# Altium PCB AT32_FOC.pcbdoc (part 2 of 2)
Units mil, origin at the board's own origin, x right, y up, seen from the top; angles counter-clockwise.
Board outline 11370.16 x 13019.92 mil, 2 copper layers (Top Layer, Bottom Layer); 154 components, 92 nets, 477 pads, 506 vias.
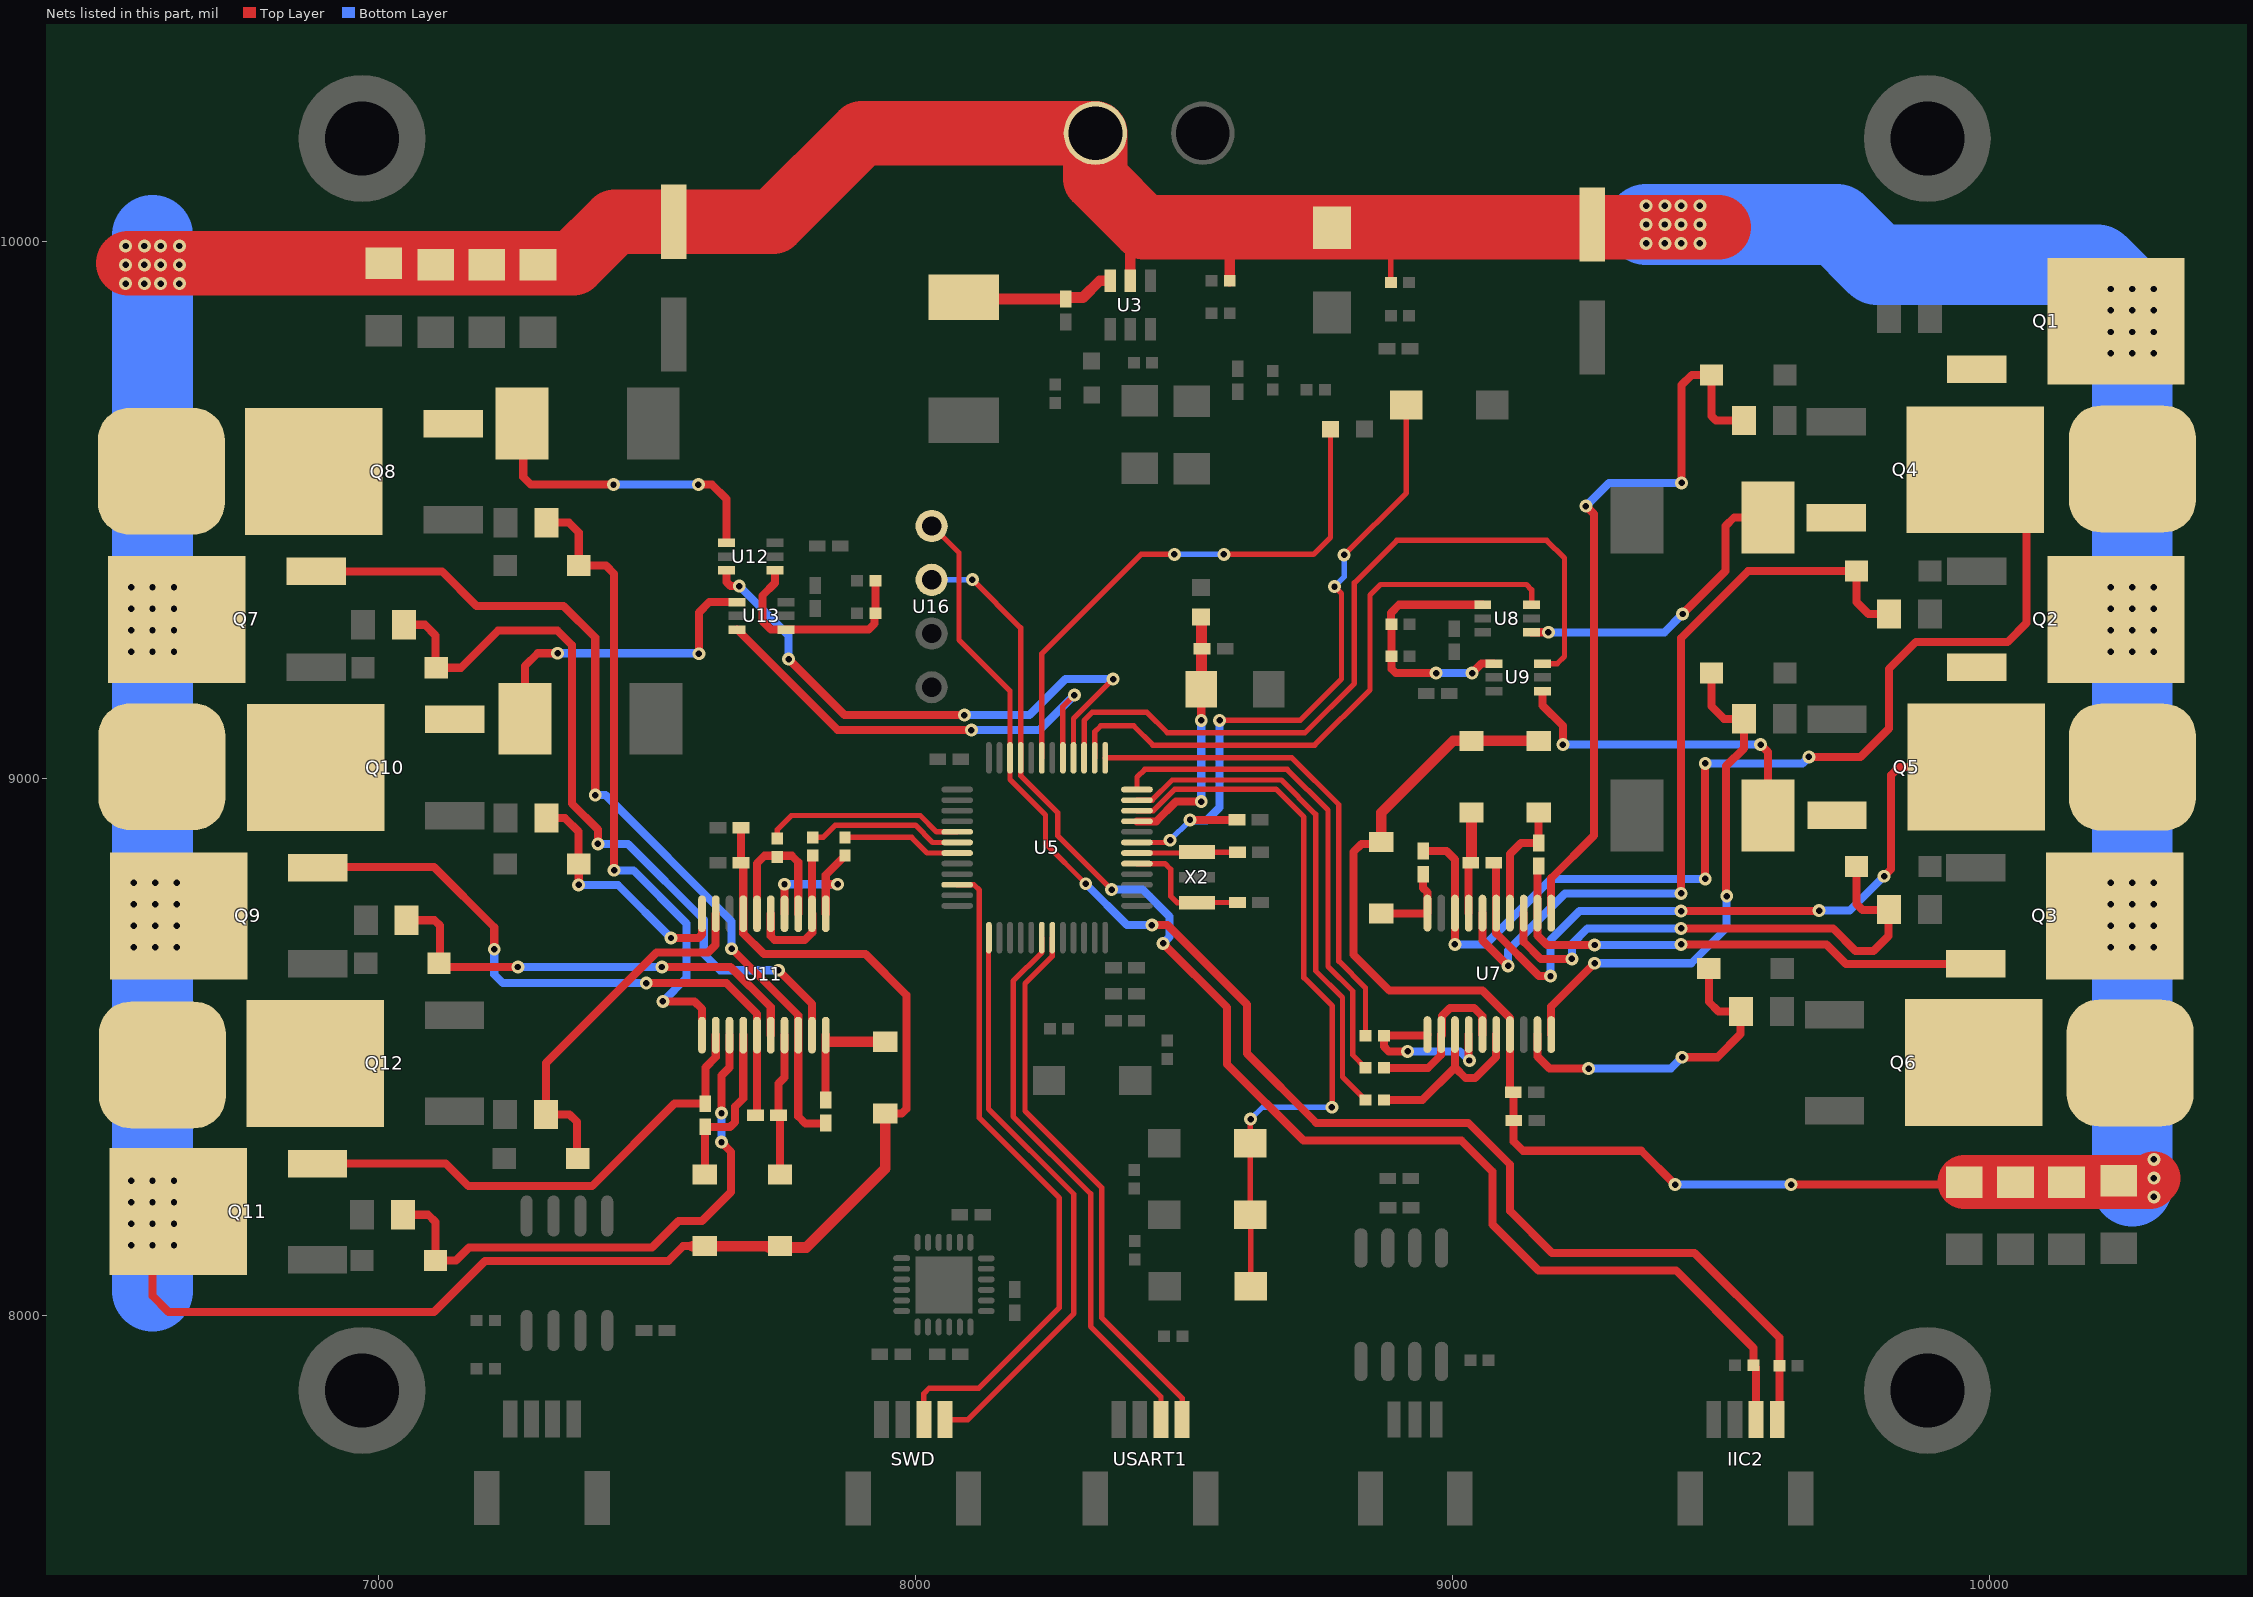
[diagram p2: the nets of this part, all layers, seen from the top]

## Via types
v1: diameter 24.02, hole 12.01, Top Layer to Bottom Layer, 506 vias

## Nets (pads, with @x,y where several pads share a name; then routed paths per layer and width w, separated by ;. In a path a pad name is that pad's centre, name@x,y a point inside that pad or via, vN(x,y) a via of type N, cw(c..) or ccw(c..) an arc to the next point about the centre after c; other vN are vias at no path point) (continued)
M0_HO1_1: D14.1 R32.1 U11.19 | length 1427.8
  Top Layer w15: R32.1@7048.12,9285.92 7087.08,9285.92 7107.08,9265.92 7107.08,9207.23 D14.1@7108.38,9205.92 7154.08,9205.92 7223.08,9274.92 7334.08,9274.92 7361.08,9247.92 7361.08,8952.92 7409.08,8904.92 v1(7409.08,8877.92) ; v1(7745.08,8642.92) 7807.57,8580.43 U11.19@7807.57,8522.01
  Bottom Layer w15: v1(7409.08,8877.92) 7465.08,8877.92 7606.08,8736.92 7606.08,8672.92 7636.08,8642.92 v1(7745.08,8642.92)
M0_HO2: D5.1 R16.1 U7.16 | length 1493.6
  Top Layer w15: U7.16@9055.44,8749.22 9055.44,8698.56 v1(9103.08,8650.92) ; v1(9425.08,8785.92) 9425.08,9260.92 9550.08,9385.92 D5.1@9751.77,9385.92 9751.77,9328.23 9774.08,9305.92 R16.1@9812.04,9305.92
  Bottom Layer w15: v1(9103.08,8650.92) 9103.08,8679.92 9209.08,8785.92 v1(9425.08,8785.92)
M0_HO2_1: D16.1 R34.1 U11.16 | length 840.3
  Top Layer w15: R34.1@7053.12,8735.92 7105.08,8735.92 7115.08,8725.92 7115.08,8657.62 D16.1@7113.38,8655.92 7120.38,8648.92 v1(7260.08,8648.92) ; v1(7528.08,8648.92) 7656.08,8648.92 7730.79,8574.21 U11.16@7730.79,8522.01
  Bottom Layer w15: v1(7260.08,8648.92) v1(7528.08,8648.92)
M0_HO3: D6.1 R17.1 U7.13 | length 997.5
  Top Layer w15: U7.13@9132.21,8749.22 9132.21,8695.79 9164.08,8663.92 v1(9222.08,8663.92) ; v1(9425.08,8720.92) 9708.08,8720.92 9750.08,8678.92 9783.08,8678.92 9811.04,8706.88 R17.1@9811.04,8754.92 ; D6.1@9751.77,8835.92 9751.77,8766.23 9763.08,8754.92 R17.1@9811.04,8754.92 ; R17.1@9812.04,8755.92 R17.1@9811.04,8754.92
  Bottom Layer w15: v1(9222.08,8663.92) 9222.08,8691.92 9251.08,8720.92 v1(9425.08,8720.92)
M0_HO3_1: D18.1 R36.1 U11.13 | length 1046.4
  Top Layer w15: R36.1@7046.31,8187.78 7093.22,8187.78 7106.57,8174.43 D18.1@7106.57,8102.78 7144.94,8102.78 7169.08,8126.92 7509.86,8126.92 7558.86,8175.92 7603.08,8175.92 7657.08,8229.92 7657.08,8304.92 v1(7639.08,8322.92) ; v1(7639.08,8376.92) 7639.08,8446.92 7654.02,8461.87 U11.13@7654.02,8522.01
  Bottom Layer w15: v1(7639.08,8322.92) v1(7639.08,8376.92)
M0_IN1: R12.2 U7.1 U7.4 | length 320.9
  Top Layer w15: v1(8916.08,8491.92) 8881.08,8491.92 8871.93,8501.07 R12.2@8871.93,8521.31 8951.22,8521.31 U7.1@8953.07,8523.16 ; U7.4@9029.84,8523.16 9029.84,8476.16 v1(9031.08,8474.92)
  Bottom Layer w15: v1(8916.08,8491.92) 9014.08,8491.92 v1(9031.08,8474.92)
M0_IN1_1: R42.2 U11.1 U11.4 | length 298.6
  Top Layer w15: U11.4@7756.39,8748.07 v1(7756.39,8802.92) ; U11.1@7833.16,8748.07 7833.16,8803.78 ; v1(7855.08,8802.92) 7834.02,8802.92 7833.16,8803.78 ; R42.2@7868.93,8856.05 7833.16,8820.28 7833.16,8803.78
  Bottom Layer w15: v1(7756.39,8802.92) v1(7855.08,8802.92)
M0_IN2: R13.2 U7.2 U7.5 | length 314.7
  Top Layer w15: R13.2@8871.93,8461.31 8954.46,8461.31 8978.66,8485.5 U7.2@8978.66,8523.16 8979.89,8521.92 8979.89,8557.92 8994.89,8572.92 9040.08,8572.92 9055.08,8557.92 9055.08,8523.51 U7.5@9055.44,8523.16
M0_IN2_1: R43.2 U11.2 U11.5 | length 271.8
  Top Layer w15: U11.5@7730.79,8748.07 7730.79,8706.28 7738.15,8698.92 7794.08,8698.92 7808.08,8712.92 7808.08,8747.57 U11.2@7807.57,8748.07 7807.57,8854.69 R43.2@7808.93,8856.05
M0_IN3: R14.2 U7.3 U7.6 | length 361.8
  Top Layer w15: R14.2@8871.93,8401.31 8943.46,8401.31 9004.25,8462.09 ; U7.3@9004.25,8523.16 9004.25,8462.09 ; U7.6@9081.03,8523.16 9081.03,8481.36 9041.58,8441.92 9024.42,8441.92 9004.25,8462.09
M0_IN3_1: R44.2 U11.3 U11.6 | length 277.6
  Top Layer w15: U11.6@7705.2,8748.07 7705.08,8748.2 7705.08,8841.92 7719.2,8856.05 7769.95,8856.05 7781.98,8844.02 U11.3@7781.98,8748.07
M0_IN_IU: Q4.3 R21.2 U8.4 | length 578.3
  Top Layer w15: U8.4@9146.58,9271.98 v1@9178.02,9271.98 ; v1(9428.08,9305.92) 9508.08,9385.92 9508.08,9469.92 9524.08,9485.92 R21.2@9587.12,9485.92
  Bottom Layer w15: v1(9178.08,9271.92) 9394.08,9271.92 v1(9428.08,9305.92)
M0_IN_IU_1: Q8.3 R40.2 U12.4 | length 577.6
  Top Layer w15: R40.2@7268.03,9660.92 7270.08,9658.88 7270.08,9560.92 7284.08,9546.92 v1(7438.08,9546.92) ; v1(7596.08,9546.92) 7621.08,9546.92 7648.3,9519.7 U12.4@7648.3,9438.19
  Bottom Layer w15: v1(7438.08,9546.92) v1(7596.08,9546.92)
M0_IN_IV: Q5.3 R22.2 U9.4 | length 621.1
  Top Layer w15: U9.4@9167.35,9162.33 9167.08,9162.06 9167.08,9135.92 9205.08,9097.92 v1(9205.08,9062.92) ; v1(9573.08,9062.92) 9587.12,9048.88 R22.2@9587.12,8930.92
  Bottom Layer w15: v1(9205.08,9062.92) v1(9573.08,9062.92)
M0_IN_IV_1: Q10.3 R41.2 U13.4 | length 588.6
  Top Layer w15: R41.2@7273.03,9110.92 7273.03,9208.88 7297.08,9232.92 v1(7334.08,9232.92) ; v1(7597.08,9231.92) 7597.08,9308.92 7616.35,9328.19 U13.4@7668.3,9328.19
  Bottom Layer w15: v1(7334.08,9232.92) 7596.08,9232.92 v1(7597.08,9231.92)
M0_IU: U5.14 U8.6 | length 1140.4
  Top Layer w10: U5.14@8333.66,9038.24 8333.66,9086.5 8345.08,9097.92 8406.08,9097.92 8442.08,9061.92 8743.08,9061.92 8846.08,9164.92 8846.08,9340.92 8866.08,9360.92 9137.08,9360.92 9147.08,9350.92 9147.08,9323.66 U8.6@9146.58,9323.16
M0_IU_1: U5.16 U12.6 | length 1074.4
  Top Layer w10: U5.16@8294.29,9038.24 8294.29,9111.13 v1(8368.08,9184.92)
  Top Layer w15: U12.6@7648.3,9387.01 7648.3,9365.8 7656.17,9357.92 v1(7672.08,9357.92) ; v1(7764.08,9221.92) 7868.08,9117.92 v1(8091.08,9117.92)
  Bottom Layer w15: v1(7672.08,9357.92) 7764.08,9265.92 v1(7764.08,9221.92) ; v1(8091.08,9117.92) 8212.08,9117.92 8279.08,9184.92 v1(8368.08,9184.92)
M0_IV: U5.15 U9.6 | length 1486.5
  Top Layer w10: U5.15@8313.98,9038.24 8313.98,9107.82 8329.08,9122.92 8431.08,9122.92 8469.09,9084.91 8725.07,9084.91 8817.08,9176.92 8817.08,9363.92 8896.08,9442.92 9175.08,9442.92 9208.08,9409.92 9208.08,9226.92 9194.67,9213.51 U9.6@9167.35,9213.51
M0_IV_1: U5.17 U13.6 | length 857.8
  Top Layer w10: U5.17@8274.61,9038.24 8274.61,9133.45 v1(8296.08,9154.92)
  Top Layer w15: U13.6@7668.3,9277.01 7855.39,9089.92 v1(8104.08,9089.92)
  Bottom Layer w15: v1(8104.08,9089.92) 8231.08,9089.92 v1(8296.08,9154.92)
M0_LO1: D7.1 R18.1 U7.11 | length 1378.7
  Top Layer w15: U7.11@9183.39,8749.22 9183.39,8814.23 9263.08,8893.92 9263.08,9491.92 v1(9248.08,9506.92) ; v1(9426.08,9549.92) 9426.08,9731.92 9445.08,9750.92 D7.1@9481.77,9750.92 9481.77,9674.23 9490.08,9665.92 R18.1@9542.04,9665.92
  Bottom Layer w15: v1(9248.08,9506.92) 9291.08,9549.92 v1(9426.08,9549.92)
M0_LO1_1: D15.1 R33.1 U11.11 | length 1220.3
  Top Layer w15: R33.1@7313.12,9475.92 7355.08,9475.92 7373.38,9457.62 D15.1@7373.38,9395.92 7424.08,9395.92 7439.08,9380.92 v1(7439.08,8828.92) ; v1(7530.08,8584.92) 7589.08,8584.92 7602.84,8571.16 U11.11@7602.84,8522.01
  Bottom Layer w15: v1(7439.08,8828.92) 7475.08,8828.92 7574.08,8729.92 7574.08,8628.92 v1(7530.08,8584.92)
M0_LO2: D8.1 R19.1 U7.10 | length 974.2
  Top Layer w15: U7.10@9183.39,8523.16 9183.39,8575.23 v1(9264.08,8655.92) ; D8.1@9481.77,9195.92 9481.77,9134.23 9505.08,9110.92 R19.1@9542.04,9110.92 ; v1(9510.08,8780.92) 9509.08,8781.92 9509.08,9022.85 9542.08,9055.85 R19.1@9542.08,9110.88
  Bottom Layer w15: v1(9264.08,8655.92) 9444.08,8655.92 9510.08,8721.92 v1(9510.08,8780.92)
M0_LO2_1: D17.1 R35.1 U11.10 | length 481.5
  Top Layer w15: R35.1@7313.12,8925.92 7348.08,8925.92 7373.08,8900.92 7373.08,8841.23 D17.1@7373.38,8840.92 7373.38,8802.23 v1(7373.08,8801.92) ; v1(7545.08,8702.92) 7596.08,8702.92 7602.84,8709.69 U11.10@7602.84,8748.07
  Bottom Layer w15: v1(7373.08,8801.92) 7446.08,8801.92 v1(7545.08,8702.92)
M0_LO3: D9.1 R20.1 U7.9 | length 626.9
  Top Layer w15: U7.9@9157.8,8523.16 9157.8,8482.2 9180.08,8459.92 v1(9253.08,8459.92) ; v1(9427.08,8480.92) 9493.08,8480.92 9536.08,8523.92 9536.08,8564.96 R20.1@9537.04,8565.92 9495.08,8565.92 9476.77,8584.23 D9.1@9476.77,8645.92
  Bottom Layer w15: v1(9253.08,8459.92) 9406.08,8459.92 v1(9427.08,8480.92)
M0_LO3_1: D19.1 R37.1 U11.9 | length 692.5
  Top Layer w15: D19.1@7371.57,8292.78 7370.08,8294.27 7370.08,8360.92 7356.46,8374.54 R37.1@7312.46,8374.54 7312.46,8470.31 7518.08,8675.92 7613.84,8675.92 7628.08,8690.16 7628.08,8747.72 U11.9@7628.43,8748.07
M0_UOUT: C18.1 Q1.3 Q4.2 U2.1 U7.18 | length 2055.1
  Top Layer w15: C18.1@8945.08,8864.68 8988.32,8864.68 9004.25,8848.75 U7.18@9004.25,8749.22 9004.08,8749.05 v1(9004.08,8690.92) ; v1(9470.08,8812.92) v1(9470.08,9027.92) ; v1@9660.08,9041.92 9661.08,9041.92 v1(9663.08,9039.92) 9759.08,9039.92 9812.08,9092.92 9812.08,9203.92 9862.08,9253.92 10033.08,9253.92 10068.08,9288.92 10068.08,9479.41 Q4.2@9973.02,9574.47
  Bottom Layer w15: v1(9004.08,8690.92) 9061.08,8690.92 9183.08,8812.92 v1(9470.08,8812.92) ; v1(9470.08,9027.92) 9651.08,9027.92 v1(9663.08,9039.92)
M0_UOUT_1: C31.1 Q7.3 Q8.2 U1.1 U11.18 | length 1685.9
  Top Layer w15: Q7.3@6884.68,9385.4 7118.6,9385.4 7183.08,9320.92 7345.08,9320.92 7404.08,9261.92 v1(7404.08,8968.92) ; v1(7658.08,8682.92) 7781.98,8559.02 U11.18@7781.98,8522.01 7781.98,8371.02 7795.08,8357.92 7832.54,8357.92 C31.1@7833.08,8358.46
  Bottom Layer w15: v1(7404.08,8968.92) 7423.08,8968.92 7658.08,8733.92 v1(7658.08,8682.92)
M0_VB1: C18.2 D1.1 U7.20 | length 162.1
  Top Layer w15: D1.1@8867.18,8748.29 8952.14,8748.29 U7.20@8953.07,8749.22 8953.07,8787.93 8945.08,8795.92 C18.2@8945.08,8821.76
M0_VB1_1: C31.2 D11.1 U11.20 | length 223.5
  Top Layer w15: C31.2@7833.08,8401.38 7833.08,8521.93 U11.20@7833.16,8522.01
  Top Layer w20: 7841.08,8509.72 D11.1@7943.93,8509.72
M0_VB2: C19.2 D2.1 U7.17 | length 189.5
  Top Layer w15: U7.17@9029.84,8749.22 9029.84,8839.44 C19.2@9033.62,8843.22
  Top Layer w20: C19.2@9033.62,8843.22 9035.08,8844.68 D2.1@9035.08,8936.59
M0_VB2_1: C32.2 D12.1 U11.17 | length 265.1
  Top Layer w15: D12.1@7748.08,8262.55 7748.08,8370.4 C32.2@7745.39,8373.09 7745.39,8432.23 7756.39,8443.24 U11.17@7756.39,8522.01
M0_VB3: C20.2 D3.1 U7.14 | length 229.2
  Top Layer w15: U7.14@9106.62,8749.22 9106.62,8859.46 9127.08,8879.92 9159.84,8879.92 C20.2@9160.08,8879.68 D3.1@9160.08,8936.59
M0_VB3_1: C30.2 D13.1 U11.14 | length 317.1
  Top Layer w15: D13.1@7608.08,8262.55 7608.08,8350.77 C30.2@7608.93,8351.63 7609.63,8350.92 7655.08,8350.92 7664.61,8360.46 7664.61,8389.46 7679.61,8404.46 U11.14@7679.61,8522.01
M0_VOUT: C19.1 Q2.3 Q5.2 U7.15 V2.1 | length 1362.9
  Top Layer w15: C19.1@9076.54,8843.22 9081.03,8838.73 U7.15@9081.03,8749.22 9081.03,8711.76 9160.86,8631.92 v1(9182.08,8631.92) ; v1(9425.08,8752.92) 9681.08,8752.92 v1(9682.08,8753.92) ; v1(9803.08,8817.92) 9816.08,8830.92 9816.08,9005.92 9831.08,9020.92 Q5.2@9974.68,9020.92
  Bottom Layer w15: v1(9182.08,8631.92) 9182.08,8698.92 9236.08,8752.92 v1(9425.08,8752.92) ; v1(9682.08,8753.92) 9739.08,8753.92 v1(9803.08,8817.92)
M0_VOUT_1: C32.1 Q9.3 Q10.2 U11.15 V1.1 | length 1172.5
  Top Layer w15: Q9.3@6887.71,8833.7 6888.93,8834.92 7104.08,8834.92 7216.08,8722.92 v1(7216.08,8681.92) ; v1(7499.08,8618.92) 7648.08,8618.92 7705.2,8561.8 U11.15@7705.2,8522.01 7705.2,8375.82 C32.1@7702.47,8373.09
  Bottom Layer w15: v1(7216.08,8681.92) 7216.08,8634.92 7232.08,8618.92 v1(7499.08,8618.92)
M0_VS3: C20.1 Q3.3 Q6.2 U7.12 W2.1 | length 968.6
  Top Layer w15: C20.1@9160.08,8836.76 9157.8,8834.48 U7.12@9157.8,8749.22 9157.8,8707.42 9175.3,8689.92 v1(9264.08,8689.92) ; v1(9425.08,8690.92) 9696.08,8690.92 9732.32,8654.68 Q3.3@9973.47,8654.68
  Bottom Layer w15: v1(9264.08,8689.92) 9424.08,8689.92 v1(9425.08,8690.92)
M0_VS3_1: C30.1 Q11.3 Q12.2 U11.12 W1.1 | length 938.3
  Top Layer w15: Q11.3@6887.28,8283.12 7125.88,8283.12 7168.08,8240.92 7398.08,8240.92 7551.7,8394.55 C30.1@7608.93,8394.55 7609.08,8394.69 7609.08,8461.92 7628.43,8481.28 U11.12@7628.43,8522.01
NRST: C11.2 NRST.1 U5.7 | length 1258.8
  Top Layer w10: U5.7@8412.4,8880.76 8469.92,8880.76 v1(8474.08,8884.92) ; v1(8566.08,9107.92) 8716.08,9107.92 8793.08,9184.92 8793.08,9343.92 v1(8780.08,9356.92) ; v1(8798.08,9415.92) 8913.73,9531.58 NRST.1@8913.73,9694.92
  Top Layer w15: v1(8511.08,8922.88) C11.2@8598.62,8922.88
  Bottom Layer w10: v1(8474.08,8884.92) v1@8510.08,8920.92 ; v1(8780.08,9356.92) 8798.08,9374.92 v1(8798.08,9415.92)
  Bottom Layer w15: v1(8511.08,8922.88) 8512.04,8921.92 8542.08,8921.92 8566.08,8945.92 v1(8566.08,9107.92)
OSC_IN: C14.2 U5.5 X2.1 | length 246.7
  Top Layer w10: U5.5@8412.4,8841.39 8464.61,8841.39 8475.08,8830.92 8475.08,8780.92 8487.32,8768.68 X2.1@8524.53,8768.68 8524.77,8768.92 C14.2@8599.62,8768.92
OSC_OUT: C12.1 U5.6 X2.3 | length 188.2
  Top Layer w10: U5.6@8412.4,8861.08 8522.45,8861.08 X2.3@8524.53,8863.16 8524.87,8862.83 C12.1@8599.62,8862.83
PA0: KEY1.1 KEY2.1 KEY3.1 U5.10 | length 1381.8
  Top Layer w10: U5.10@8412.4,8939.82 8442.98,8939.82 8483.08,8979.92 8671.08,8979.92 8723.08,8927.92 8723.08,8629.14 8776.08,8576.14 8776.08,8388.92 v1(8775.08,8387.92) ; v1@8623.08,8364.92 8623.2,8364.8 KEY1.1@8623.2,8320.92 KEY2.1@8623.2,8187.92 8624.2,8186.92 KEY3.1@8624.2,8054.92
  Bottom Layer w10: v1(8624.08,8365.92) 8646.08,8387.92 v1(8775.08,8387.92)
PA1: R14.1 U5.11 | length 944.7
  Top Layer w10: U5.11@8412.4,8959.5 8440.66,8959.5 8478.08,8996.92 8681.08,8996.92 8745.08,8932.92 8745.08,8641.92 8795.08,8591.92 8795.08,8444.08 R14.1@8837.85,8401.31
PA2: R13.1 U5.12 | length 924.8
  Top Layer w10: U5.12@8412.4,8979.19 8412.4,9002.24 8427.08,9016.92 8692.08,9016.92 8768.08,8940.92 8768.08,8649.92 8814.08,8603.92 8814.08,8485.08 R13.1@8837.85,8461.31
PA3: R12.1 U5.13 | length 921.1
  Top Layer w10: U5.13@8353.35,9038.24 8700.76,9038.24 8788.08,8950.92 8788.08,8659.92 8837.85,8610.15 R12.1@8837.85,8521.31
PA8: R44.1 U5.29 | length 375
  Top Layer w10: R44.1@7743.08,8887.96 7743.08,8904.92 7769.08,8930.92 8009.08,8930.92 8039.55,8900.45 U5.29@8077.76,8900.45
PA9: R43.1 U5.30 | length 291.6
  Top Layer w10: R43.1@7808.93,8890.13 7828.28,8890.13 7851.08,8912.92 8000.08,8912.92 8032.24,8880.76 U5.30@8077.76,8880.76
PA10: R42.1 U5.31 | length 220.9
  Top Layer w10: R42.1@7868.93,8890.13 7992.87,8890.13 8021.92,8861.08 U5.31@8077.76,8861.08
PA13: SWD.3 U5.34 | length 1251.3
  Top Layer w10: SWD.3@8015.76,7806.55 8015.76,7855.08 8025.76,7865.08 8118.24,7865.08 8268.08,8014.92 8268.08,8218.92 8119.08,8367.92 8119.08,8791.92 8108.98,8802.02 U5.34@8077.76,8802.02
PA14: SWD.4 U5.37 | length 1087.5
  Top Layer w10: SWD.4@8055.13,7806.55 8097.57,7806.55 8295.08,8004.06 8295.08,8225.92 8136.08,8384.92 8136.08,8702.87 U5.37@8136.81,8703.6
PB1: LED2.1 U5.19 | length 1022.2
  Top Layer w10: U5.19@8235.24,9038.24 8235.24,9232.08 8420.08,9416.92 v1(8482.08,9416.92) ; v1(8574.08,9416.92) 8741.08,9416.92 8772.73,9448.57 LED2.1@8772.73,9649.78
  Bottom Layer w10: v1(8482.08,9416.92) v1(8574.08,9416.92)
PB6: U5.42 USART1.3 | length 1033
  Top Layer w10: U5.42@8235.24,8703.6 8235.24,8676.01 8182.08,8622.85 8182.08,8370.92 8326.08,8226.92 8326.08,7979.92 8457.08,7848.92 USART1.3@8457.08,7806.55
PB7: U5.43 USART1.4 | length 1039.2
  Top Layer w10: U5.43@8254.92,8703.6 8254.92,8669.1 8204.08,8618.26 8204.08,8380.92 8347.08,8237.92 8347.08,7995.92 8496.45,7846.55 USART1.4@8496.45,7806.55
PB10: IIC2.3 R47.1 U5.21 U16.3 | length 2609.6
  Top Layer w10: v1(8106.08,9369.92) 8195.87,9280.13 U5.21@8195.87,9038.24 8195.87,9005.13 8265.08,8935.92 8265.08,8892.92 v1(8365.08,8792.92)
  Top Layer w15: v1(8461.08,8692.92) 8580.08,8573.92 8580.08,8467.92 8722.08,8325.92 9016.08,8325.92 9074.08,8267.92 9074.08,8169.92 9160.08,8083.92 9416.08,8083.92 9559.96,7940.04 R47.1@9559.96,7907.92 9564.76,7903.12 IIC2.3@9564.76,7806.55
  Bottom Layer w10: U16.3@8030.28,9369.62 8030.58,9369.92 v1(8106.08,9369.92)
  Bottom Layer w15: v1(8365.08,8792.92) 8423.08,8792.92 8473.08,8742.92 8473.08,8704.92 v1(8461.08,8692.92)
PB11: IIC2.4 R48.1 U5.22 U16.4 | length 2683.8
  Top Layer w10: U16.4@8030.28,9469.62 8031.38,9469.62 8081.08,9419.92 8081.08,9257.92 8176.18,9162.82 U5.22@8176.18,9038.24 8176.18,8997.82 8242.08,8931.92 8242.08,8878.92 v1(8317.08,8803.92)
  Top Layer w15: v1(8440.08,8726.92) 8469.08,8726.92 8617.08,8578.92 8617.08,8487.92 8746.08,8358.92 9029.08,8358.92 9107.08,8280.92 9107.08,8194.92 9185.08,8116.92 9450.08,8116.92 9608.08,7958.92 R48.1@9608.08,7907.19 ; IIC2.4@9604.13,7806.55 9608.14,7810.56 R48.1@9608.14,7907.13
  Bottom Layer w15: v1(8317.08,8803.92) 8394.08,8726.92 v1(8440.08,8726.92)
SW: C2.2 L1.1 U3.6 | length 287.9
  Top Layer w20: L1.1@8090.08,9895.6 8093.3,9892.38 C2.2@8280.08,9892.38 8282.62,9894.92 8312.08,9894.92 8343.32,9926.16 U3.6@8362.68,9926.16
VDDA: C9.2 C10.2 L2.1 U5.9 | length 480
  Top Layer w15: U5.9@8412.4,8920.13 8448.29,8920.13 8485.08,8956.92 v1(8532.08,8956.92) ; v1(8532.08,9107.92) 8532.08,9165.62 C9.2@8532.38,9165.92
  Top Layer w20: C9.2@8532.38,9165.92 8532.38,9239.68 C10.2@8533.62,9240.92 8532.52,9242.02 L2.1@8532.52,9300.92
  Bottom Layer w15: v1(8532.08,8956.92) v1(8532.08,9107.92)
VIN: C5.1 C13.1 C21.2 C22.2 C26.2 C27.2 C33.1 C34.1 C35.1 C36.1 C37.1 C38.1 C39.1 C40.1 D1.2 D2.2 D3.2 D10.2 D11.2 D12.2 D13.2 Q1.2 Q2.2 Q3.2 Q7.2 Q9.2 Q11.2 R3.2 R49.1 U3.5 U7.7 U11.7 U15.1 | length 12928.7
  Top Layer w10: R49.1@8885.04,9922.92 8885.04,10005.88
  Top Layer w15: v1(6580.08,8130.92) 6580.08,8036.92 6610.08,8006.92 7104.08,8006.92 7199.08,8101.92 7540.08,8101.92 7567.45,8129.29 7585.08,8129.29 ; C27.2@7675.39,8908.09 C26.2@7675.39,8843.09 7679.61,8838.86 U11.7@7679.61,8748.07 7679.61,8711.39 7718.08,8672.92 7907.08,8672.92 7983.08,8596.92 7983.08,8384.92 7974.61,8376.46 D11.2@7943.93,8376.46 ; D1.2@8867.18,8881.55 8863.55,8877.92 8830.08,8877.92 8815.08,8862.92 8815.08,8671.92 8882.08,8604.92 9055.61,8604.92 9106.62,8553.92 U7.7@9106.62,8523.16 9106.62,8421.72 C21.2@9112.82,8415.52 9113.62,8414.72 C22.2@9113.62,8363.22 9113.62,8324.38 9131.08,8306.92 9351.08,8306.92 v1(9414.08,8243.92) ; v1(9630.08,8243.92) 9947.88,8243.92 C36.1@9952.58,8248.62
  Top Layer w20: 7585.08,8129.29 D13.2@7608.08,8129.29 7725.08,8129.29 7727.45,8126.92 7797.08,8126.92 7943.93,8273.77 D11.2@7943.93,8376.46 ; U3.5@8400.08,9926.16 8400.08,9992.92 8402.08,9994.92 ; 8533.08,9993.92 8537.12,9989.88 ; R3.2@8585.12,9925.92 8585.12,9989.88 ; D1.2@8867.18,8881.55 8867.18,8936.02 9001.08,9069.92 9035.01,9069.92 D2.2@9035.08,9069.85 D3.2@9160.08,9069.85
  Top Layer w100: C36.1@9952.58,8248.62 C35.1@10047.58,8248.62 C34.1@10142.58,8248.62 10297.78,8248.62 v1(10305.08,8255.92)
  Top Layer w120: v1@6535.08,9958.62 C37.1@7010.08,9958.62 7362.78,9958.62 7440.19,10036.04 C5.1@7550.07,10036.04 7550.19,10035.92 7735.08,10035.92 7900.08,10200.92 U15.1@8335.08,10200.92 8335.08,10115.92 8425.08,10025.92 9495.08,10025.92
  Bottom Layer w15: v1(9414.08,8243.92) v1(9630.08,8243.92)
  Bottom Layer w150: 6580.08,8045.92 v1(6580.08,8130.92) v1(6580.08,8170.89) v1(6580.08,8210.95) v1(6580.08,8250.92) v1(6580.08,9235.92) v1(6580.08,9275.89) v1(6580.08,9315.95) v1(6580.08,9355.92) 6580.08,10010.92 ; v1(9360.08,10030.92) v1(9395.05,10030.92) v1(9425.11,10030.92) v1(9460.08,10030.92) 9715.08,10030.92 9790.08,9955.92 10200.08,9955.92 10265.08,9890.92 v1(10265.08,9870.95) v1(10265.08,9830.89) v1(10265.08,9790.92) v1(10265.08,9355.92) v1(10265.08,9315.95) v1(10265.08,9275.89) v1(10265.08,9235.92) v1(10265.08,8805.92) v1(10265.08,8765.95) v1(10265.08,8725.89) v1(10265.08,8685.92) 10265.08,8240.92
  other v1: 6540.08,8130.92 6620.08,8130.92 6540.08,8170.89 6620.08,8170.89 6540.08,8210.95 6620.08,8210.95 10305.08,8220.92 6540.08,8250.92 6620.08,8250.92 10305.08,8290.92 6545.08,8685.92 6585.08,8685.92 6625.08,8685.92 10225.08,8685.92 10305.08,8685.92 6545.08,8725.89 6585.08,8725.89 6625.08,8725.89 10225.08,8725.89 10305.08,8725.89 6545.08,8765.95 6585.08,8765.95 6625.08,8765.95 10225.08,8765.95 10305.08,8765.95 6545.08,8805.92 6585.08,8805.92 6625.08,8805.92 10225.08,8805.92 10305.08,8805.92 6540.08,9235.92 6620.08,9235.92 10225.08,9235.92 10305.08,9235.92 6540.08,9275.89 6620.08,9275.89 10225.08,9275.89 10305.08,9275.89 6540.08,9315.95 6620.08,9315.95 10225.08,9315.95 10305.08,9315.95 6540.08,9355.92 6620.08,9355.92 10225.08,9355.92 10305.08,9355.92 10225.08,9790.92 10305.08,9790.92 10225.08,9830.89 10305.08,9830.89 10225.08,9870.95 10305.08,9870.95 10225.08,9910.92 10265.08,9910.92 10305.08,9910.92 6530.08,9920.92 6565.05,9920.92 6595.11,9920.92 6630.08,9920.92 6530.08,9955.92 6565.05,9955.92 6595.11,9955.92 6630.08,9955.92 6530.08,9990.92 6565.05,9990.92 6595.11,9990.92 6630.08,9990.92 9360.08,9995.92 9395.05,9995.92 9425.11,9995.92 9460.08,9995.92 9360.08,10065.92 9395.05,10065.92 9425.11,10065.92 9460.08,10065.92
VREF: R23.2 R24.1 U8.1 U9.1 | length 494.5
  Top Layer w15: R23.2@8885.87,9227.24 8885.87,9238.72 ; v1(8969.08,9195.92) 8894.08,9195.92 8886.08,9203.92 8886.08,9238.51 8885.87,9238.72 ; v1(9036.08,9195.92) 9053.67,9213.51 U9.1@9076.81,9213.51 ; U8.1@9056.04,9323.16 8900.32,9323.16 8885.08,9307.92 8885.08,9288.04 R24.1@8885.87,9287.24 8885.87,9238.72
  Bottom Layer w15: v1(8969.08,9195.92) v1(9036.08,9195.92)
VREF_1: R38.2 R39.1 U12.1 U13.1 | length 404.4
  Top Layer w15: U12.1@7738.84,9387.01 7738.84,9363.68 7715.08,9339.92 7715.08,9292.92 7731.08,9276.92 7758.74,9276.92 U13.1@7758.84,9277.01 7913.17,9277.01 7924.08,9287.92 7924.08,9306.08 R39.1@7925.6,9307.6 R38.2@7925.6,9367.6
pads on no net: U4.5 U5.2 U5.3 U5.4 U5.20 U5.25 U5.26 U5.27 U5.28 U5.32 U5.33 U5.38 U5.39 U5.40 U5.41 U17.2 U17.3 U17.4 U17.5 U17.6 U17.7 U17.12 U17.14 U17.15 U17.16 U17.17 U17.19 U17.21 U17.22

## Polygon pours and split planes (outlines as drawn)
M0_UOUT on Top Layer (solid, remove dead copper, pour order 0): 9845.08,9455.92 10385.08,9455.92 10385.08,9695.92 9845.08,9695.92
M0_UOUT on Top Layer (solid, remove dead copper, pour order 2): 9915.08,9655.92 10035.08,9655.92 10035.08,9790.92 9915.08,9790.92
M0_VOUT on Top Layer (solid, remove dead copper, pour order 4): 9841.57,8902.68 10381.57,8902.68 10381.57,9142.68 9841.57,9142.68
M0_VOUT on Top Layer (solid, remove dead copper, pour order 6): 9911.57,9102.68 10031.57,9102.68 10031.57,9237.68 9911.57,9237.68
M0_VS3 on Top Layer (solid, remove dead copper, pour order 8): 9839.57,8350.92 10379.57,8350.92 10379.57,8590.92 9839.57,8590.92
M0_VS3 on Top Layer (solid, remove dead copper, pour order 10): 9914.57,8550.92 10034.57,8550.92 10034.57,8685.92 9914.57,8685.92
M0_UOUT_1 on Top Layer (solid, remove dead copper, pour order 12): 7018.59,9689.16 6478.59,9689.16 6478.59,9449.16 7018.59,9449.16
M0_UOUT_1 on Top Layer (solid, remove dead copper, pour order 14): 6948.59,9489.16 6823.59,9489.16 6823.59,9354.16 6948.59,9354.16
M0_VOUT_1 on Top Layer (solid, remove dead copper, pour order 16): 7018.1,9139.22 6478.1,9139.22 6478.1,8899.22 7018.1,8899.22
M0_VOUT_1 on Top Layer (solid, remove dead copper, pour order 18): 6948.1,8939.22 6828.1,8939.22 6828.1,8804.22 6948.1,8804.22
M0_VS3_1 on Top Layer (solid, remove dead copper, pour order 20): 7017.68,8588.64 6477.68,8588.64 6477.68,8348.64 7017.68,8348.64
M0_VS3_1 on Top Layer (solid, remove dead copper, pour order 22): 6947.68,8388.64 6827.68,8388.64 6827.68,8253.64 6947.68,8253.64
GND on Top Layer (solid, remove dead copper, pour order 56): 6430.08,7561.92 10414.08,7561.92 10414.08,10367.92 6430.08,10367.92
GND on Bottom Layer (solid, remove dead copper, pour order 116): 6430.08,7561.92 10414.08,7561.92 10414.08,10367.92 6430.08,10367.92
$2N16058 on Top Layer (solid, remove dead copper, pour order 24): 6940.74,9322.03 6995.08,9322.03 6995.08,9180.92 6830.08,9180.92 6830.08,9233.26 6940.08,9233.26 6940.08,9321.36
M0_IN_IU on Top Layer (solid, remove dead copper, pour order 26): 9774.95,9526.91 9689.95,9526.91 9654.95,9561.91 9534.95,9561.91 9534.95,9411.91 9659.95,9411.91 9684.95,9436.91 9774.95,9436.91
M0_IN_IV on Top Layer (solid, remove dead copper, pour order 28): 9776.61,8973.36 9691.61,8973.36 9656.61,9008.36 9536.61,9008.36 9536.61,8858.36 9661.61,8858.36 9686.61,8883.36 9776.61,8883.36
M0_IN_IV_1 on Top Layer (solid, remove dead copper, pour order 30): 7085.08,9065.92 7170.08,9065.92 7200.08,9035.92 7325.08,9035.92 7325.08,9185.92 7205.08,9185.92 7175.08,9155.92 7085.08,9155.92
M0_IN_IU_1 on Top Layer (solid, remove dead copper, pour order 32): 7082.05,9616.72 7167.05,9616.72 7197.05,9586.72 7322.05,9586.72 7322.05,9736.72 7202.05,9736.72 7172.05,9706.72 7082.05,9706.72
$2N16067 on Top Layer (solid, remove dead copper, pour order 34): 6943.77,8770.33 6998.1,8770.33 6998.1,8629.22 6833.1,8629.22 6833.1,8681.56 6943.1,8681.56 6943.1,8769.66
$2N16077 on Top Layer (solid, remove dead copper, pour order 36): 6943.34,8219.75 6997.68,8219.75 6997.68,8078.64 6832.68,8078.64 6832.68,8130.98 6942.68,8130.98 6942.68,8219.08
$2N1987 on Top Layer (solid, remove dead copper, pour order 38): 9917.41,8718.05 9863.08,8718.05 9863.08,8859.16 10028.08,8859.16 10028.08,8806.82 9918.08,8806.82 9918.08,8718.72
$2N1706 on Top Layer (solid, remove dead copper, pour order 40): 9919.41,9269.82 9865.08,9269.82 9865.08,9410.92 10030.08,9410.92 10030.08,9358.59 9920.08,9358.59 9920.08,9270.48
$2N1251 on Top Layer (solid, remove dead copper, pour order 42): 9919.41,9824.82 9865.08,9824.82 9865.08,9965.92 10030.08,9965.92 10030.08,9913.59 9920.08,9913.59 9920.08,9825.48
$2N1356 on Top Layer (solid, remove dead copper, pour order 44): 9645.08,9780.92 9590.74,9780.92 9590.74,9634.82 9770.74,9634.82 9770.74,9692.15 9645.74,9692.15 9645.74,9780.26
$2N1723 on Top Layer (solid, remove dead copper, pour order 46): 9644.6,9225.93 9590.26,9225.93 9590.26,9079.82 9770.26,9079.82 9770.26,9137.16 9645.26,9137.16 9645.26,9225.26
$2N2004 on Top Layer (solid, remove dead copper, pour order 48): 9640.08,8675.92 9585.74,8675.92 9585.74,8529.82 9765.74,8529.82 9765.74,8587.15 9640.74,8587.15 9640.74,8675.26
$2N16082 on Top Layer (solid, remove dead copper, pour order 50): 7208.74,8262.77 7263.08,8262.77 7263.08,8408.88 7083.08,8408.88 7083.08,8351.55 7208.08,8351.55 7208.08,8263.44
$2N16072 on Top Layer (solid, remove dead copper, pour order 52): 7210.08,8815.92 7264.41,8815.92 7264.41,8962.03 7084.41,8962.03 7084.41,8904.69 7209.41,8904.69 7209.41,8816.59
$2N16063 on Top Layer (solid, remove dead copper, pour order 54): 7210.56,9365.92 7264.89,9365.92 7264.89,9512.02 7084.89,9512.02 7084.89,9454.69 7209.89,9454.69 7209.89,9366.58

## Keep-outs
Top Layer:
  region: 8383.12,8748.54 8638.16,8748.54 8638.16,8894.97 8383.12,8894.97
Bottom Layer:
  region: 8383.12,8748.54 8638.16,8748.54 8638.16,8894.97 8383.12,8894.97
Board Outline Layer:
  lines w10: 6711.7,10324.91 ccw(c6703.15,10082.26) 6460.86,10066.52 6460.86,7847.98 ccw(c6703.51,7839.44) 6719.25,7597.15 10145.51,7597.15 ccw(c10154.06,7839.8) 10396.35,7855.54 10397.59,10074.24 ; 6711.7,10325.08 10139.51,10325.08 ; 10139.51,10325.07 cw(c10155.25,10082.78) 10397.9,10074.24

## Other copper
Top Layer:
  drawing of 415 lines, arcs and shapes, not listed
Bottom Layer:
  drawing of 94 lines, arcs and shapes, not listed

## Silkscreen, mask and mechanical layers (free items; w line width, h text height)
Top Silkscreen Layer:
  text "+" at 8130.08,10167.28 h78.45
  text "-" at 8675.08,10167.28 h78.45
  text "12V" at 7903.43,10161.56 h77.88
  text "斓" at 9533.56,10006 h135.94
  text "G3CD" at 7045.3,7675.91 h29.2
  text "G3CD" at 7741.3,7672.91 h29.2
  text "G3TR" at 8597.3,7665.91 h29.2
  text "G3CD" at 9691.3,7664.91 h29.2
  text "GHL" at 9052.58,7652.91 h29.2
Bottom Silkscreen Layer:
  text "KEY(PA0) /  LED(PB1) /  BATTERY(PB0) /  MOTOR1(PA8 PA9 PA10) /  MOTOR2(PA1 PA2 PA3) /  I-SENSE1(PA6 PA7) /  I-SENSE2(PA4 PA5) /  IIC1(PF6-SCL PF7-SDA)-MPU-FLASH /  IIC2(PB10-SCL PB11-SDA)-OLED /  SWD(PA13-CLK PA14-DIO) /  USART1(PB6-TX PB7-RX) /  CAN(PB8-RX PB9-TX)" at 8209.91,9992.33 h38.78 r180
  text "KEY(PA0) /  LED(PB1) /  BATTERY(PB0) /  MOTOR1(PA8 PA9 PA10) /  MOTOR2(PA1 PA2 PA3) /  I-SENSE1(PA6 PA7) /  I-SENSE2(PA4 PA5) /  IIC1(PF6-SCL PF7-SDA)-MPU-FLASH /  IIC2(PB10-SCL PB11-SDA)-OLED /  SWD(PA13-CLK PA14-DIO) /  USART1(PB6-TX PB7-RX) /  CAN(PB8-RX PB9-TX)" at 10107.18,9859.67 h38.78 r90
  text "KEY(PA0) /  LED(PB1) /  BATTERY(PB0) /  MOTOR1(PA8 PA9 PA10) /  MOTOR2(PA1 PA2 PA3) /  I-SENSE1(PA6 PA7) /  I-SENSE2(PA4 PA5) /  IIC1(PF6-SCL PF7-SDA)-MPU-FLASH /  IIC2(PB10-SCL PB11-SDA)-OLED /  SWD(PA13-CLK PA14-DIO) /  USART1(PB6-TX PB7-RX) /  CAN(PB8-RX PB9-TX)" at 6685.47,8660.25 h38.78 r270
  text "KEY(PA0) /  LED(PB1) /  BATTERY(PB0) /  MOTOR1(PA8 PA9 PA10) /  MOTOR2(PA1 PA2 PA3) /  I-SENSE1(PA6 PA7) /  I-SENSE2(PA4 PA5) /  IIC1(PF6-SCL PF7-SDA)-MPU-FLASH /  IIC2(PB10-SCL PB11-SDA)-OLED /  SWD(PA13-CLK PA14-DIO) /  USART1(PB6-TX PB7-RX) /  CAN(PB8-RX PB9-TX)" at 8660.25,7627.52 h38.78

## Text inside footprints (layer, text, board x,y; h text height)
U16: Mech6 "D" at 8086.38,9448.49 h52.3; Mech6 "C" at 8081.38,9343.49 h52.3; Mech6 "V" at 8081.38,9238.49 h52.3; Mech6 "G" at 8081.38,9138.49 h52.3